# Altium PCB buoi12.PcbDoc
Units mm, origin at the board's own origin, x right, y up, seen from the top; angles counter-clockwise.
Board outline 60 x 90 mm, 2 copper layers (Top Layer, Bottom Layer); 84 components, 79 nets, 377 pads, 77 vias.
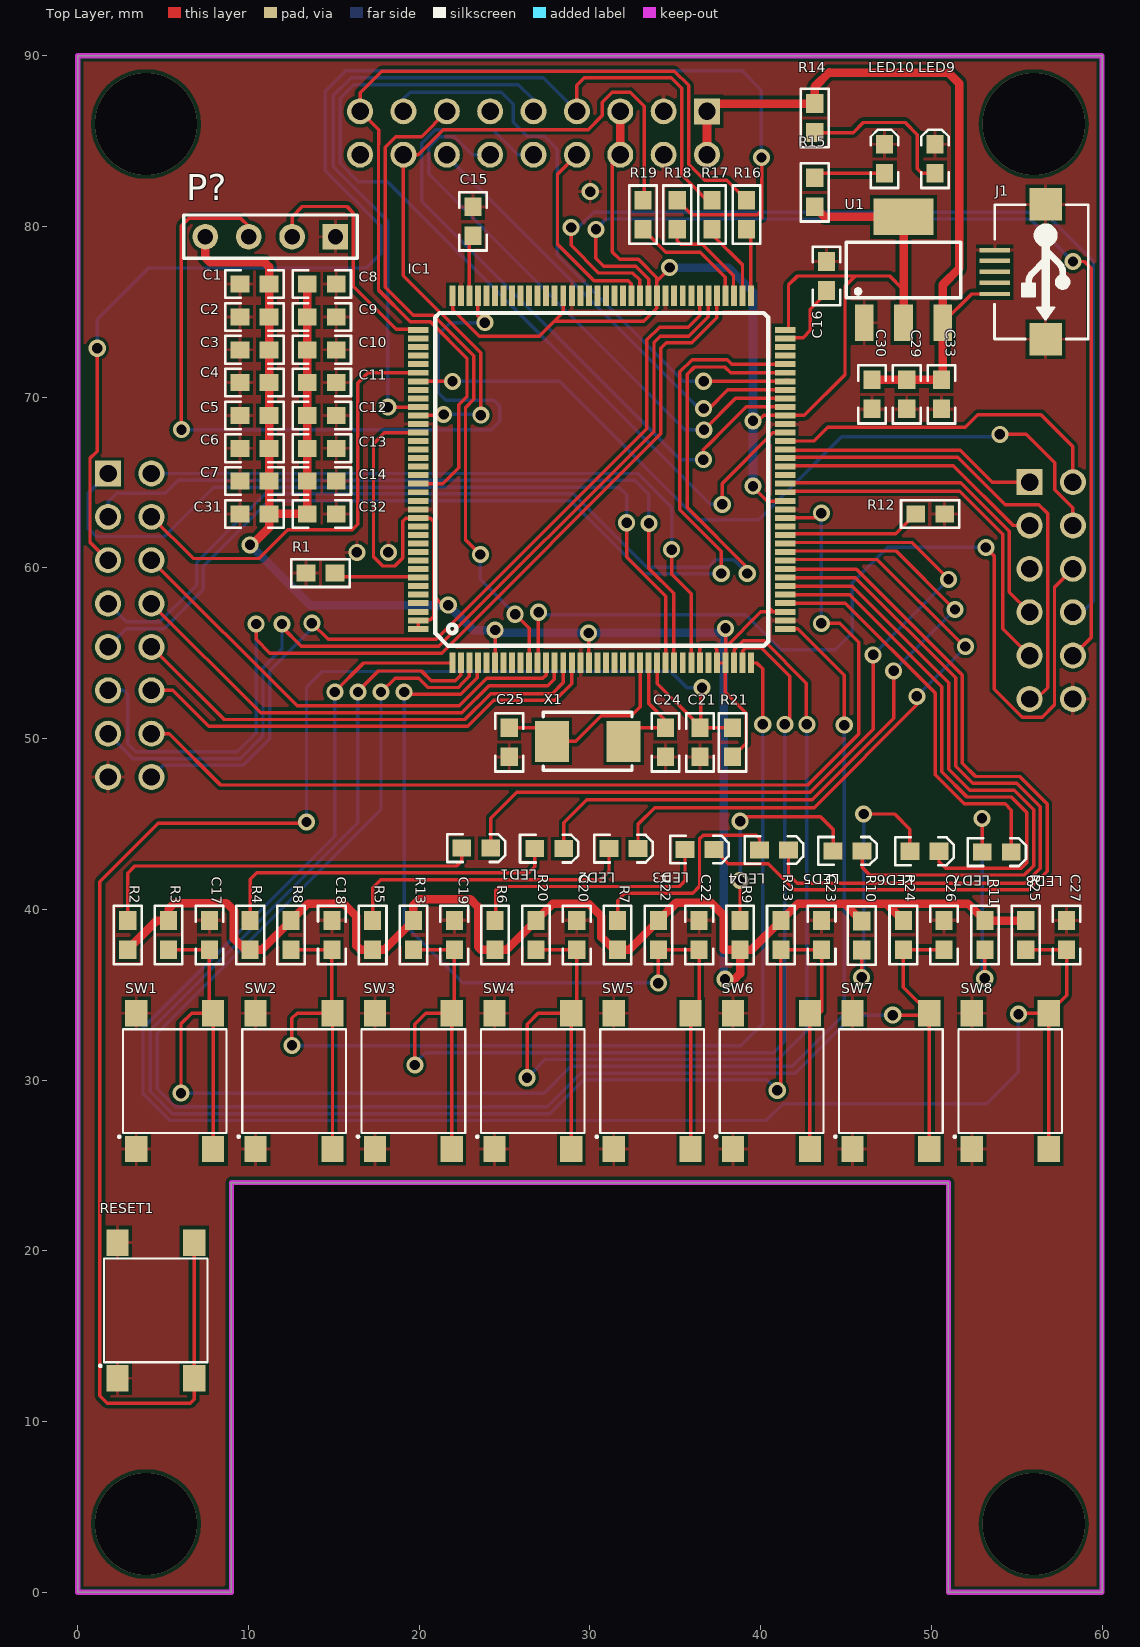
[diagram p0: Top Layer view]
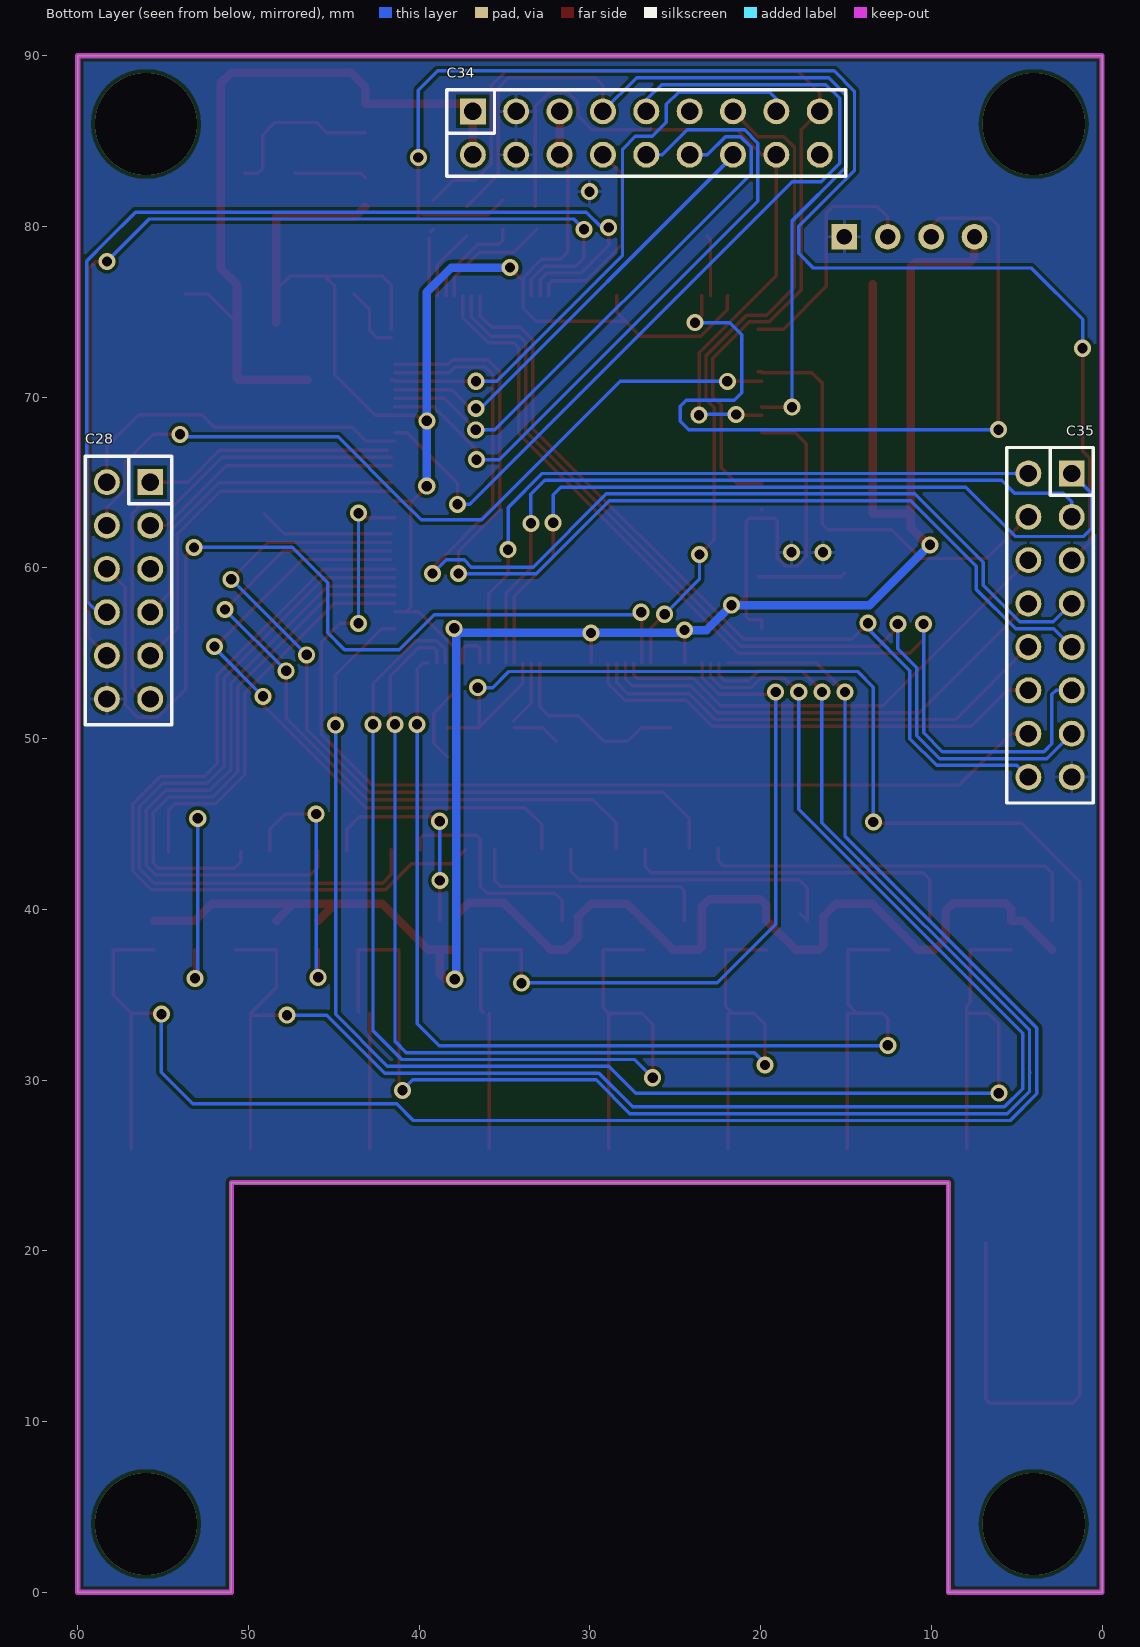
[diagram p1: Bottom Layer view, seen from below]
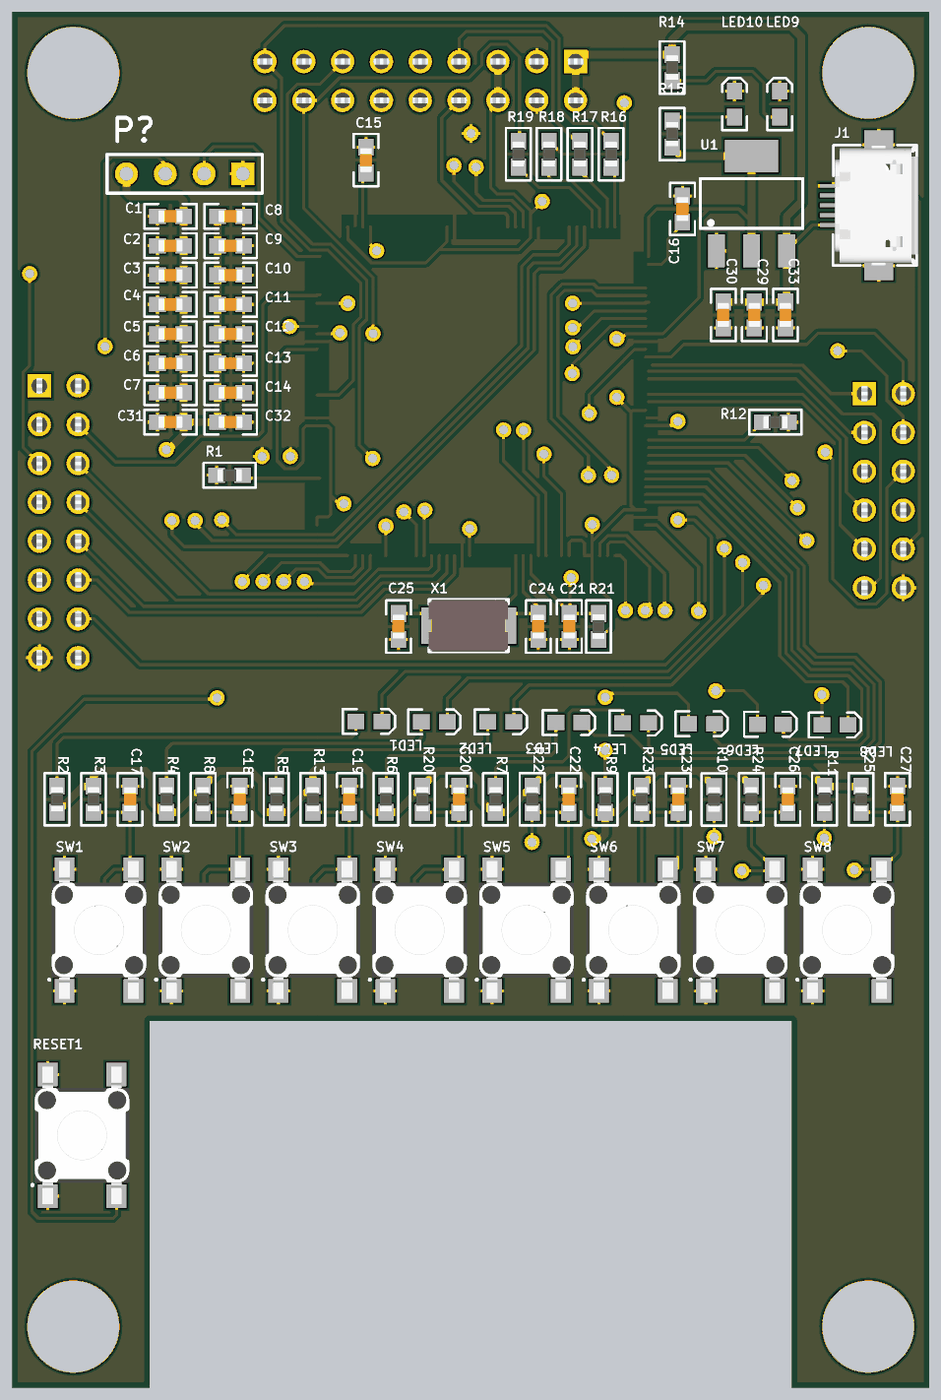
[diagram p2: 3D render of the assembled board from above, using the file's embedded part models]
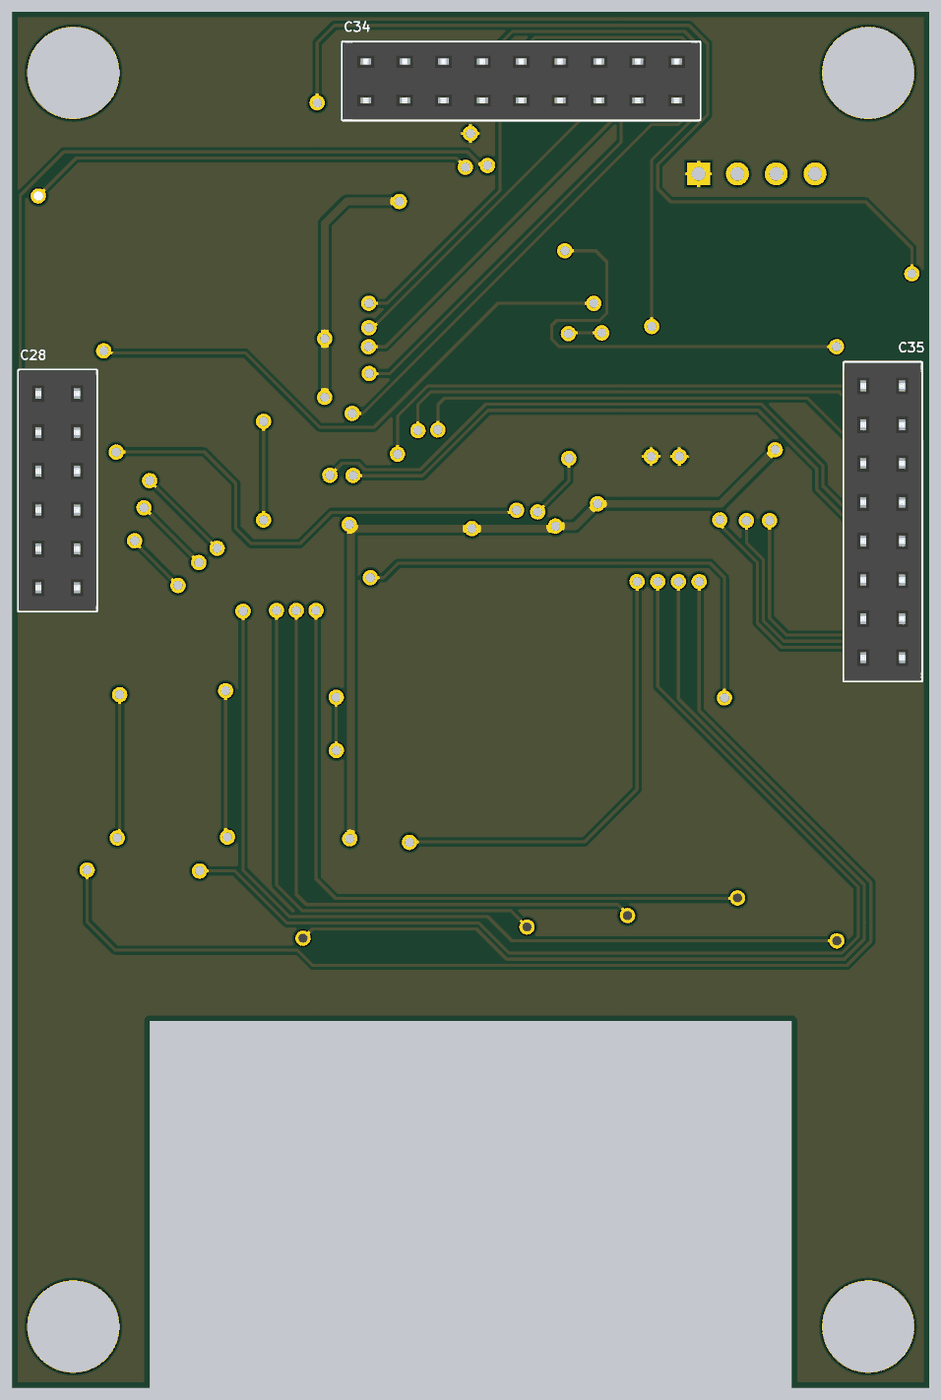
[diagram p3: 3D render of the assembled board from below, using the file's embedded part models]

## Layer stack, top to bottom
Top Solder: solder mask 0.0102, Solder Resist, Dk 3.5
Top Layer: signal copper 0.0356
Dielectric 1: dielectric 0.32, FR-4, Dk 4.8
Bottom Layer: signal copper 0.0356
Bottom Solder: solder mask 0.0102, Solder Resist, Dk 3.5

## Board outline
0,0 0,90 60,90 60,0 51,0 51,24 9,24 9,0

## Design rules (kind name [scope] priority, off if disabled: settings)
Clearance [All] p1: gap=0.2 ignorepadtopadclearanceinfootprint=FALSE
PolygonConnect [All] p1: connectstyle=Relief reliefconductorwidth=0.2 reliefentries=4 polygonreliefangle="90 Angle" airgapwidth=0.2
RoutingVias [All] p1: holewidth=0.6 width=1 viastyle="Through Hole" minholewidth=0.6 minwidth=1 maxholewidth=0.6 maxwidth=1
SolderMaskExpansion [All] p1: expansion=0.102
Width [All] p1: maxlimit=0.5 minlimit=0.2 preferedwidth=0.5
30 further rules are at their usual default settings.

## Classes and differential pairs
component class buoi122: C28 C29 C30 C31 C32 C33 C34 C35 J1 U1
component class buoi121: C1 C2 C3 C4 C5 C6 C7 C8 C9 C10 C11 C12 C13 C14 C15 C16 C17 C18 C19 C20 C21 C22 C23 C24 C25 C26 C27 IC1 LED1 LED2 LED3 LED4 LED5 LED6 LED7 LED8 LED9 LED10 P? R1 R2 R3 R4 R5 R6 R7 R8 R9 R10 R11 R12 R13 R14 R15 R16 R17 R18 R19 R20 R21 R22 R23 R24 R25 RESET1 SW1 SW2 SW3 SW4 SW5 SW6 SW7 SW8 X1

## Components (designator, comment, footprint, x,y, rotation, side; value= is the part's Value field where it differs from the comment)
C1 "0.1uF" "CAPC-0603 (1608)" 10.358,76.622 r0 top value=104/50V
C2 "0.1uF" "CAPC-0603 (1608)" 10.358,74.699 r0 top value=104/50V
C3 "0.1uF" "CAPC-0603 (1608)" 10.358,72.776 r0 top value=104/50V
C4 "0.1uF" "CAPC-0603 (1608)" 10.358,70.853 r0 top value=104/50V
C5 "0.1uF" "CAPC-0603 (1608)" 10.358,68.929 r0 top value=104/50V
C6 "0.1uF" "CAPC-0603 (1608)" 10.358,67.006 r0 top value=104/50V
C7 "0.1uF" "CAPC-0603 (1608)" 10.358,65.083 r0 top value=104/50V
C8 "0.1uF" "CAPC-0603 (1608)" 14.295,76.622 r180 top value=104/50V
C9 "0.1uF" "CAPC-0603 (1608)" 14.295,74.699 r180 top value=104/50V
C10 "0.1uF" "CAPC-0603 (1608)" 14.295,72.776 r180 top value=104/50V
C11 "0.1uF" "CAPC-0603 (1608)" 14.295,70.853 r180 top value=104/50V
C12 "0.1uF" "CAPC-0603 (1608)" 14.295,68.929 r180 top value=104/50V
C13 "0.1uF" "CAPC-0603 (1608)" 14.295,67.006 r180 top value=104/50V
C14 "0.1uF" "CAPC-0603 (1608)" 14.295,65.083 r180 top value=104/50V
C15 "2.2uF" "CAPC-0603 (1608)" 23.15,80.3 r270 top value=104/50V
C16 "2.2uF" "CAPC-0603 (1608)" 43.854,77.098 r270 top value=104/50V
C17 "1nF" "CAPC-0603 (1608)" 7.712,38.49 r270 top value=104/50V
C18 "1nF" "CAPC-0603 (1608)" 14.884,38.49 r270 top value=104/50V
C19 "1nF" "CAPC-0603 (1608)" 22.057,38.49 r270 top value=104/50V
C20 "1nF" "CAPC-0603 (1608)" 29.23,38.49 r270 top value=104/50V
C21 "0.1uF" "CAPC-0603 (1608)" 36.452,49.786 r90 top value=104/50V
C22 "1nF" "CAPC-0603 (1608)" 36.402,38.49 r270 top value=104/50V
C23 "1nF" "CAPC-0603 (1608)" 43.575,38.49 r270 top value=104/50V
C24 "22pF" "CAPC-0603 (1608)" 34.42,49.786 r90 top value=104/50V
C25 "22pF" "CAPC-0603 (1608)" 25.276,49.786 r90 top value=104/50V
C26 "1nF" "CAPC-0603 (1608)" 50.747,38.49 r270 top value=104/50V
C27 "1nF" "CAPC-0603 (1608)" 57.92,38.49 r270 top value=104/50V
C28 "JP6x2" JP6-C2T 57.023,58.674 r270 bottom
C29 "0.1uF" "CAPC-0603 (1608)" 48.558,70.168 r90 top value=104/50V
C30 "0.1uF" "CAPC-0603 (1608)" 46.526,70.168 r90 top value=104/50V
C31 "0.1uF" "CAPC-0603 (1608)" 10.358,63.16 r0 top value=104/50V
C32 "0.1uF" "CAPC-0603 (1608)" 14.295,63.16 r180 top value=104/50V
C33 "0.1uF" "CAPC-0603 (1608)" 50.59,70.168 r90 top value=104/50V
C34 "JP9x2" JP9-C2T 26.698,85.471 r180 bottom
C35 "JP8x2" JP8-C2T 3.048,56.642 r270 bottom
IC1 "STM32F407ZGT6" "PCBComponent_1 - duplicate" 35.514,-58.644 r90 top
J1 "USB-5" USB-M1 53.721,77.343 r270 top
LED1 "LED" LED_0603_BLUE 23.343,43.583 r0 top value="LED 3 - 5 ly 2 Colour"
LED2 "LED" LED_0603_BLUE 27.618,43.556 r0 top value="LED 3 - 5 ly 2 Colour"
LED3 "LED" LED_0603_BLUE 31.969,43.556 r0 top value="LED 3 - 5 ly 2 Colour"
LED4 "LED" LED_0603_BLUE 36.42,43.505 r0 top value="LED 3 - 5 ly 2 Colour"
LED5 "LED" LED_0603_BLUE 40.785,43.48 r0 top value="LED 3 - 5 ly 2 Colour"
LED6 "LED" LED_0603_BLUE 45.096,43.43 r0 top value="LED 3 - 5 ly 2 Colour"
LED7 "LED" LED_0603_BLUE 49.597,43.405 r0 top value="LED 3 - 5 ly 2 Colour"
LED8 "LED" LED_0603_BLUE 53.833,43.35 r0 top value="LED 3 - 5 ly 2 Colour"
LED9 "LED" LED_0603_BLUE 50.21,83.963 r90 top value="LED 3 - 5 ly 2 Colour"
LED10 "LED" LED_0603_BLUE 47.26,83.963 r90 top value="LED 3 - 5 ly 2 Colour"
P? "Header 4" HDR1X4 15.095,79.399 r180 top
R1 "1K" "RESC-0603 (1608)" 14.224,59.69 r0 top value=2K2
R2 "1K" "RESC-0603 (1608)" 2.93,38.49 r270 top value=2K2
R3 "1K" "RESC-0603 (1608)" 5.321,38.49 r270 top value=2K2
R4 "1K" "RESC-0603 (1608)" 10.103,38.49 r270 top value=2K2
R5 "1K" "RESC-0603 (1608)" 17.275,38.49 r270 top value=2K2
R6 "1K" "RESC-0603 (1608)" 24.448,38.49 r270 top value=2K2
R7 "1K" "RESC-0603 (1608)" 31.62,38.49 r270 top value=2K2
R8 "1K" "RESC-0603 (1608)" 12.493,38.49 r270 top value=2K2
R9 "1K" "RESC-0603 (1608)" 38.793,38.49 r270 top value=2K2
R10 "1K" "RESC-0603 (1608)" 45.921,38.476 r90 top value=2K2
R11 "1K" "RESC-0603 (1608)" 53.138,38.49 r90 top value=2K2
R12 "1K" "RESC-0603 (1608)" 49.93,63.16 r180 top value=2K2
R13 "1K" "RESC-0603 (1608)" 19.666,38.49 r270 top value=2K2
R14 "1K" "RESC-0603 (1608)" 43.17,86.35 r90 top value=2K2
R15 "1K" "RESC-0603 (1608)" 43.17,82 r270 top value=2K2
R16 "1K" "RESC-0603 (1608)" 39.178,80.687 r270 top value=2K2
R17 "1K" "RESC-0603 (1608)" 37.146,80.687 r270 top value=2K2
R18 "1K" "RESC-0603 (1608)" 35.114,80.687 r270 top value=2K2
R19 "1K" "RESC-0603 (1608)" 33.11,80.687 r270 top value=2K2
R20 "1K" "RESC-0603 (1608)" 26.839,38.49 r270 top value=2K2
R21 "1K" "RESC-0603 (1608)" 38.357,49.786 r90 top value=2K2
R22 "1K" "RESC-0603 (1608)" 34.011,38.49 r270 top value=2K2
R23 "1K" "RESC-0603 (1608)" 41.184,38.49 r270 top value=2K2
R24 "1K" "RESC-0603 (1608)" 48.356,38.49 r270 top value=2K2
R25 "1K" "RESC-0603 (1608)" 55.529,38.49 r270 top value=2K2
RESET1 "SW" SW2-SMD 4.572,16.51 r90 top value="Button chip 4 pin"
SW1 "SW" SW2-SMD 5.68,29.94 r90 top value="Button chip 4 pin"
SW2 "SW" SW2-SMD 12.671,29.94 r90 top value="Button chip 4 pin"
SW3 "SW" SW2-SMD 19.663,29.94 r90 top value="Button chip 4 pin"
SW4 "SW" SW2-SMD 26.654,29.94 r90 top value="Button chip 4 pin"
SW5 "SW" SW2-SMD 33.646,29.94 r90 top value="Button chip 4 pin"
SW6 "SW" SW2-SMD 40.637,29.94 r90 top value="Button chip 4 pin"
SW7 "SW" SW2-SMD 47.629,29.94 r90 top value="Button chip 4 pin"
SW8 "SW" SW2-SMD 54.62,29.94 r90 top value="Button chip 4 pin"
U1 "AMS117-3.3V" SOT223 48.37,77.46 r0 top
X1 "8MHZ" "CRYSTAL_ABM3 5x3.2mm" 29.876,49.843 r180 top value=12MHz

## Footprints (in the part's own frame and the unit in brackets; to place one, negate y for a bottom-side part, rotate by r counter-clockwise, add the part's x,y. Pads: shape width x height; smd on the part's side, far side on the other; paste and mask are expansions set on the pad)
"CAPC-0603 (1608)" [mm] "Resistor, Chip; 1.60 mm L X 0.80 mm W X 0.50 mm H body"
  rect 1.1x1 smd mask+0.1: 1(-0.85,0) 2(0.85,0)
  silkscreen extent -1.71,-0.81 1.71,0.81, body extent -0.8,-0.4 0.8,0.4, height 0.6
"CRYSTAL_ABM3 5x3.2mm" [mm] "Crystal 5x3.2mm"
  rect 2x2.4 smd: 1(-2.1,0) 2(2.1,0)
  silkscreen extent -2.59,-1.7 2.61,1.7, body extent -2.57,-1.7 2.63,1.7, height 1.3
HDR1X4 [mm] "Connector; Header; 4 Position"
  rect 1.5x1.5 hole 0.9: 1(0,0)
  round 1.5 hole 0.9: 2(2.54,0) 3(5.08,0) 4(7.62,0)
  silkscreen extent -1.27,-1.27 8.89,1.27, body extent -1.27,-1.27 8.89,1.27, height 7
JP6-C2T [mm] "12 pins, dual row, straight, gold plating"
  rect 1.52x1.52 hole 1.02: 1(-6.35,1.27)
  round 1.52 hole 1.02: 2(-3.81,1.27) 3(-1.27,1.27) 4(1.27,1.27) 5(3.81,1.27) 6(6.35,1.27) 7(6.35,-1.27) 8(3.81,-1.27) 9(1.27,-1.27) 10(-1.27,-1.27) 11(-3.81,-1.27) 12(-6.35,-1.27)
  silkscreen extent -7.87,-2.54 7.87,2.54, body extent -7.87,-2.54 7.87,2.54, height 8.51
JP8-C2T [mm] "16 pins, dual row, straight, gold plating"
  rect 1.52x1.52 hole 1.02: 1(-8.89,1.27)
  round 1.52 hole 1.02: 2(-6.35,1.27) 3(-3.81,1.27) 4(-1.27,1.27) 5(1.27,1.27) 6(3.81,1.27) 7(6.35,1.27) 8(8.89,1.27) 9(8.89,-1.27) 10(6.35,-1.27) 11(3.81,-1.27) 12(1.27,-1.27) 13(-1.27,-1.27) 14(-3.81,-1.27) 15(-6.35,-1.27) 16(-8.89,-1.27)
  silkscreen extent -10.41,-2.54 10.41,2.54, body extent -10.41,-2.54 10.41,2.54, height 8.51
JP9-C2T [mm] "18 pins, dual row, straight, gold plating"
  rect 1.52x1.52 hole 1.02: 1(-10.16,1.27)
  round 1.52 hole 1.02: 2(-7.62,1.27) 3(-5.08,1.27) 4(-2.54,1.27) 5(0,1.27) 6(2.54,1.27) 7(5.08,1.27) 8(7.62,1.27) 9(10.16,1.27) 10(10.16,-1.27) 11(7.62,-1.27) 12(5.08,-1.27) 13(2.54,-1.27) 14(0,-1.27) 15(-2.54,-1.27) 16(-5.08,-1.27) 17(-7.62,-1.27) 18(-10.16,-1.27)
  silkscreen extent -11.68,-2.54 11.68,2.54, body extent -11.68,-2.54 11.68,2.54, height 8.51
LED_0603_BLUE [mm] "LED SMD; Body 1.6 x 0.8 mm (LxW typ)"
  rect 1.1x1 smd mask+0.1: 1(-0.851,0) 2(0.849,0)
  silkscreen extent -1.71,-0.81 1.71,0.81, body extent -0.8,-0.4 0.8,0.4, height 0.75
"PCBComponent_1 - duplicate" [mm]
  rect 1.2x0.35 smd: 1(113.075,13.576) 2(113.075,13.076) 3(113.075,12.576) 4(113.075,12.076) 5(113.075,11.576) 6(113.075,11.076) 7(113.075,10.576) 8(113.075,10.076) 9(113.075,9.576) 10(113.075,9.076) 11(113.075,8.576) 12(113.075,8.076) 13(113.075,7.576) 14(113.075,7.076) 15(113.075,6.576) 16(113.075,6.076) 17(113.075,5.576) 18(113.075,5.076) 19(113.075,4.576) 20(113.075,4.076) 21(113.075,3.576) 22(113.075,3.076) 23(113.075,2.576) 24(113.075,2.076) 25(113.075,1.576) 26(113.075,1.076) 27(113.075,0.576) 28(113.075,0.076) 29(113.075,-0.424) 30(113.075,-0.924) 31(113.075,-1.424) 32(113.075,-1.924) 33(113.075,-2.424) 34(113.075,-2.924) 35(113.075,-3.424) 36(113.075,-3.924) 73(134.575,-3.924) 74(134.575,-3.424) 75(134.575,-2.924) 76(134.575,-2.424) 77(134.575,-1.924) 78(134.575,-1.424) 79(134.575,-0.924) 80(134.575,-0.424) 81(134.575,0.076) 82(134.575,0.576) 83(134.575,1.076) 84(134.575,1.576) 85(134.575,2.076) 86(134.575,2.576) 87(134.575,3.076) 88(134.575,3.576) 89(134.575,4.076) 90(134.575,4.576) 91(134.575,5.076) 92(134.575,5.576) 93(134.575,6.076) 94(134.575,6.576) 95(134.575,7.076) 96(134.575,7.576) 97(134.575,8.076) 98(134.575,8.576) 99(134.575,9.076) 100(134.575,9.576) 101(134.575,10.076) 102(134.575,10.576) 103(134.575,11.076) 104(134.575,11.576) 105(134.575,12.076) 106(134.575,12.576) 107(134.575,13.076) 108(134.575,13.576)
  rect 0.35x1.2 smd: 37(115.075,-5.924) 38(115.575,-5.924) 39(116.075,-5.924) 40(116.575,-5.924) 41(117.075,-5.924) 42(117.575,-5.924) 43(118.075,-5.924) 44(118.575,-5.924) 45(119.075,-5.924) 46(119.575,-5.924) 47(120.075,-5.924) 48(120.575,-5.924) 49(121.075,-5.924) 50(121.575,-5.924) 51(122.075,-5.924) 52(122.575,-5.924) 53(123.075,-5.924) 54(123.575,-5.924) 55(124.075,-5.924) 56(124.575,-5.924) 57(125.075,-5.924) 58(125.575,-5.924) 59(126.075,-5.924) 60(126.575,-5.924) 61(127.075,-5.924) 62(127.575,-5.924) 63(128.075,-5.924) 64(128.575,-5.924) 65(129.075,-5.924) 66(129.575,-5.924) 67(130.075,-5.924) 68(130.575,-5.924) 69(131.075,-5.924) 70(131.575,-5.924) 71(132.075,-5.924) 72(132.575,-5.924) 109(132.575,15.576) 110(132.075,15.576) 111(131.575,15.576) 112(131.075,15.576) 113(130.575,15.576) 114(130.075,15.576) 115(129.575,15.576) 116(129.075,15.576) 117(128.575,15.576) 118(128.075,15.576) 119(127.575,15.576) 120(127.075,15.576) 121(126.575,15.576) 122(126.075,15.576) 123(125.575,15.576) 124(125.075,15.576) 125(124.575,15.576) 126(124.075,15.576) 127(123.575,15.576) 128(123.075,15.576) 129(122.575,15.576) 130(122.075,15.576) 131(121.575,15.576) 132(121.075,15.576) 133(120.575,15.576) 134(120.075,15.576) 135(119.575,15.576) 136(119.075,15.576) 137(118.575,15.576) 138(118.075,15.576) 139(117.575,15.576) 140(117.075,15.576) 141(116.575,15.576) 142(116.075,15.576) 143(115.575,15.576) 144(115.075,15.576)
  silkscreen extent 114.07,-4.92 133.58,14.58, body extent 112.82,-6.17 134.83,15.83, height 0.72
"RESC-0603 (1608)" [mm] "Resistor, Chip; 1.60 mm L X 0.80 mm W X 0.50 mm H body"
  rect 1.1x1 smd mask+0.1: 1(-0.85,0) 2(0.85,0)
  silkscreen extent -1.71,-0.81 1.71,0.81, body extent -0.8,-0.4 0.8,0.4, height 0.5
SOT223 [mm] "SOT-223/SC-73; 4 Leads; Body 6.7 x 7.3 mm, inc. leads (LxW max)"
  rect 1.1x2.15 smd: 1(-2.3,-3.1) 2(0,-3.1) 3(2.3,-3.1)
  rect 3.5x2.15 smd: 4(0,3.1)
  silkscreen extent -3.35,-1.63 3.35,1.63, body extent -3.43,-1.65 3.43,1.65, height 2.54
SW2-SMD [mm] "6*6mm vertical type, SMD, height 5.0mm, black actuator, 160gf, T&R"
  rect 1.55x1.3 smd: 1(-3.975,2.25) 2(-3.975,-2.25) 3(3.975,-2.25) 4(3.975,2.25)
  silkscreen extent -3.29,-3.04 3.04,3.29, body extent -4.5,-3.1 4.5,3.1, height 4.99
USB-M1 [mil]
  rect 10x70 smd: 1(51.18,0) 2(25.59,0) 3(0,0) 4(-25.59,0) 5(-50,0)
  rect 74.8x74.8 smd: 5(-155.51,116.84) 5(155.51,116.84)
  silkscreen extent -155,-1 155,215, body extent -157,5 158,218, height 107

## Part data
C1 C2 C3 C4 C5 C6 C7 C8 C9 C10 C11 C12 C13 C14 C15 C16 C17 C18 C19 C20 C21 C22 C23 C24 C25 C26 C27 C29 C30 C31 C32 C33: library part C0603C104K5RACTU, "CAP CER 0.1uF 50V 10% X7R 0603", Category=CAPACITOR, CompanyID=VT-00982, MPN=C0603C104K5RACTU, PinCount=2, Solder=SMT
C28: "WR-PHD 2.54 mm Dual Socket Header", Manufacturer="Würth Elektronik eiSos GmbH", partNo=61301221821, ComponentLink1 Description=Manufacturer, ComponentLink1URL=http://www.we-online.com, ComponentLink2 Description=Datasheet, ComponentLink2URL=http://katalog.we-online.de/em/datasheet/6130xx21821.pdf, Created by="Karrer Zheng", Created Date="29 March 2013", NoPins=12
C34: "WR-PHD 2.54 mm Dual Socket Header", Manufacturer="Würth Elektronik eiSos GmbH", partNo=61301821821, ComponentLink1 Description=Manufacturer, ComponentLink1URL=http://www.we-online.com, ComponentLink2 Description=Datasheet, ComponentLink2URL=http://katalog.we-online.de/em/datasheet/6130xx21821.pdf, Created by="Karrer Zheng", Created Date="29 March 2013", NoPins=18
C35: "WR-PHD 2.54 mm Dual Socket Header", Manufacturer="Würth Elektronik eiSos GmbH", partNo=61301621821, ComponentLink1 Description=Manufacturer, ComponentLink1URL=http://www.we-online.com, ComponentLink2 Description=Datasheet, ComponentLink2URL=http://katalog.we-online.de/em/datasheet/6130xx21821.pdf, Created by="Karrer Zheng", Created Date="29 March 2013", NoPins=16
IC1: library part STM32
J1: Manufacturer=FCI, Manufacturer Part Number=10118193-0001LF, Supplier Part Number 1=609-4616-1-ND, .Checked PCB=RF, .Checked SCH=MM, .Creator=MM, Category="Connectors, Interconnects", ComponentLink1Description=http://portal.fciconnect.com/Comergent//fci/drawing/10118193.pdf, ComponentLink1URL=http://portal.fciconnect.com/Comergent//fci/drawing/10118193.pdf, Connector Type="USB - micro B", Features="Shielded, Solder Retention", Gender=Receptacle, Ingress Protection=-, Mounting Type="Surface Mount, Right Angle, Horizontal", Number of Contacts=5, Packaging="Cut Tape (CT)", Pricing 1="1=0.46, 10=0.433, 25=0.3712, 50=0.3156, 100=0.3032, 250=0.27224, 500=0.25988 (USD)", RoHS="RoHS Compliant", Specifications="USB 2.0", Stock 1=28642, Supplier 1=Digi-Key
LED1 LED2 LED3 LED4 LED5 LED6 LED7 LED8 LED9 LED10: library part "LED SMD"
P?: "Header, 4-Pin", LatestRevisionDate=17-Jul-2002, LatestRevisionNote="Re-released for DXP Platform.", Publisher="Altium Limited"
R1 R2 R3 R4 R5 R6 R7 R8 R9 R10 R11 R12 R13 R14 R15 R16 R17 R18 R19 R20 R21 R22 R23 R24 R25: library part CRCW06032K20FKEA, "RES SMD 2.2K OHM 1% 1/10W 0603", Category=RESISTOR, CompanyID=VT-00776, MPN=CRCW06032K20FKEA, Solder=SMT
RESET1 SW1 SW2 SW3 SW4 SW5 SW6 SW7 SW8: library part SW4, "Switch button 4 pin"
U1: library part AMS117-1.2V
X1: library part ABM3-12.000MHZ-D2Y-T, "CRYSTAL 25.0000MHZ 18pF SMD", Category=CRYSTAL, CompanyID=VT-01247, MPN=ABM3-12.000MHZ-D2Y-T, Solder=SMT

## Via types
v1: diameter 1, hole 0.6, Top Layer to Bottom Layer, 73 vias
v2: diameter 6, hole 6, Top Layer to Bottom Layer, 4 vias

## Nets (pads, with @x,y where several pads share a name; then routed paths per layer and width w, separated by ;. In a path a pad name is that pad's centre, name@x,y a point inside that pad or via, vN(x,y) a via of type N, cw(c..) or ccw(c..) an arc to the next point about the centre after c; other vN are vias at no path point)
+3.3V: C1.2 C2.2 C3.2 C4.2 C5.2 C6.2 C7.2 C8.2 C9.2 C10.2 C11.2 C12.2 C13.2 C14.2 C31.2 C32.2 C34.3 C34.16 IC1.6 IC1.17 IC1.30 IC1.32 IC1.33 IC1.39 IC1.52 IC1.62 IC1.72 IC1.84 IC1.95 IC1.108 IC1.121 IC1.131 IC1.143 IC1.144 P?.4 R2.2 R3.1 R4.2 R5.2 R6.2 R7.2 R8.1 R9.2 R10.2 R11.2 R13.1 R15.2 R20.1 R21.1 R22.1 R23.1 R24.1 R25.1 U1.2 U1.4 | length 299.1
  Top Layer w0.2: IC1.144 IC1.143 19.963,56.956 20.662,56.956 20.838,57.132 20.838,58.356 ; IC1.121 19.913,67.906 17.96,67.906 17.325,67.271 17.325,60.642 17.857,60.11 18.567,60.11 19.038,60.581 19.038,62.73 19.214,62.906 19.913,62.906 IC1.131 19.963,62.906 20.662,62.906 20.838,62.73 20.838,58.356 ; v1(21.703,57.817) 21.377,57.817 20.838,58.356 ; IC1.108 21.963,75.906 21.963,75.117 23.515,73.565 27.041,73.565 27.912,74.436 ; IC1.6 24.452,54.445 v1(24.452,56.356) ; IC1.95 28.438,74.962 27.912,74.436 ; v1(29.929,56.194) 29.929,54.44 IC1.17 ; C34.16 31.306,83.729 31.306,78.505 31.74,78.071 32.846,78.071 33.913,77.004 33.913,76.856 ; v1(34.674,77.594) 34.674,77.567 33.938,76.831 33.913,76.856 ; IC1.30 36.438,55.277 36.592,55.431 37.257,55.431 37.438,55.25 IC1.32 IC1.33 ; v1(37.949,56.462) 37.949,55.365 ; R21.1 39.157,49.736 39.157,51.491 37.938,52.71 IC1.33 ; v1(39.553,68.613) 39.852,68.613 40.17,68.931 IC1.62 42.565,68.931 44.94,71.306 44.94,76.493 45.545,77.098 ; v1(39.557,64.785) 39.513,64.785 40.482,63.816 ; 40.714,57.456 40.482,57.688 40.482,63.816 ; IC1.39 40.015,57.431 37.949,55.365 ; IC1.52 41.413,63.906 40.572,63.906 40.482,63.816 ; IC1.72@41.63,73.99 41.63,76.57 42.158,77.098 45.545,77.098 ; 48.37,76.324 48.336,76.324 47.562,77.098 45.545,77.098 ; 27.912,74.436 33.142,74.436 33.913,75.207 33.913,76.856 ; IC1.33 37.938,54.568 37.949,54.579 37.949,55.365
  Top Layer w0.5: R2.2 4.63,39.34 R3.1 5.321,40.021 5.67,40.37 8.71,40.37 9.153,39.927 9.153,38.277 9.79,37.64 R4.2 10.793,37.64 R8.1 13.493,40.34 15.571,40.34 16.325,39.586 16.325,37.875 16.56,37.64 R5.2 17.966,37.64 R13.1 19.666,40.252 20.017,40.603 22.992,40.603 23.451,40.144 23.451,37.799 23.61,37.64 R6.2 25.139,37.64 R20.1 27.839,40.34 29.916,40.34 30.67,39.586 30.67,38.38 31.41,37.64 R7.2 32.311,37.64 R22.1 35.061,40.39 37.09,40.39 37.84,39.64 37.84,37.64 R9.2 ; P?.4 7.475,78.181 7.75,77.906 10.931,77.906 11.208,77.629 C1.2 C2.2 C3.2 C4.2 C5.2 C6.2 C7.2 C31.2 ; v1(10.084,61.353) 10.207,61.353 11.208,62.354 C31.2 ; C8.2 C9.2 C10.2 C11.2 C12.2 C13.2 C14.2 C32.2 C31.2 ; C34.16 C34.3 ; v1(37.916,35.907) 38.463,35.907 38.793,36.237 R9.2 ; R15.2 43.76,80.56 U1.4 48.37,76.324 U1.2 ; R10.2 44.907,40.34 ; R24.1 47.356,40.34 ; R25.1 R11.2 52.138,40.34 47.356,40.34 ; R9.2 39.484,37.64 R23.1 42.184,40.34 44.907,40.34 ; 44.907,40.34 47.356,40.34
  Bottom Layer w0.5: v1(10.084,61.353) 13.62,57.817 v1(21.703,57.817) 23.164,56.356 v1(24.452,56.356) 24.614,56.194 v1(29.929,56.194) 37.681,56.194 v1@37.841,56.354 ; v1(34.674,77.594) 38.111,77.594 39.553,76.152 v1(39.553,68.613) 39.553,64.789 v1(39.557,64.785) ; v1(37.916,35.907) 37.841,35.982 v1@37.841,56.354 ; v1(37.949,56.462) v1@37.841,56.354
+5V: C29.2 C30.2 C33.2 C34.1 C34.18 J1.1 R14.2 U1.3 | length 44.7
  Top Layer w0.2: U1.3 52.353,76.043 J1.1
  Top Layer w0.5: C34.18 C34.1 37.317,87.2 R14.2 43.17,88.18 44.03,89.04 44.06,89.01 50.994,89.01 51.62,88.384 51.62,77.54 50.67,76.59 U1.3 50.67,71.098 C33.2 C29.2 C30.2
D0: C28.8 IC1.85 | length 59.8
  Top Layer w0.2: v1(30.352,79.833) 30.352,78.136 30.817,77.671 32.68,77.671 33.438,76.913 IC1.85 ; v1(58.29,77.948) 58.956,77.948 59.353,77.551 59.353,55.924 C28.8
  Bottom Layer w0.2: v1(30.352,79.833) 30.955,80.436 55.802,80.436 v1(58.29,77.948)
D1: C28.9 IC1.86 | length 60.4
  Top Layer w0.2: v1(28.903,79.943) 28.903,78.889 30.521,77.271 32.514,77.271 32.913,76.872 32.913,75.956 IC1.86
  Bottom Layer w0.2: v1(28.903,79.943) 29.321,79.943 30.214,80.836 56.617,80.836 58.29,79.163 59.476,77.977 59.476,58.05 58.83,57.404 C28.9
D2: C35.15 IC1.114 | length 26.2
  Top Layer w0.2: C35.15 6.757,60.553 10.637,60.553 12.314,62.23 16.07,62.23 16.4,62.56 16.4,70.83 17.001,71.431 IC1.114 ; IC1.114@19.938,71.49 IC1.114@20.13,71.49
D3: C28.11 IC1.115 | length 47.5
  Top Layer w0.2: IC1.115 21.949,70.931 v1(21.952,70.928) ; v1(54.009,67.823) 55.564,67.823 57.233,66.154 57.233,64.585 58.293,63.525 C28.11
  Bottom Layer w0.2: v1(21.952,70.928) 28.218,70.928 36.327,62.819 39.884,62.819 41.096,64.031 44.737,67.672 53.858,67.672 v1(54.009,67.823)
D4: C28.1 IC1.58 | length 14.9
  Top Layer w0.2: IC1.58@41.875,66.892 51.016,66.892 ; 50.771,66.89 51.702,66.89 53.568,65.024 C28.1
D5: C28.12 IC1.59 | length 20.4
  Top Layer w0.2: IC1.59 43.11,67.431 43.923,68.244 51.989,68.244 52.726,68.981 56.422,68.981 58.293,67.11 C28.12
D6: C34.5 IC1.60 | length 53.3
  Top Layer w0.2: v1(37.753,63.726) 37.753,64.945 40.714,67.906 41.413,67.906 IC1.60
  Bottom Layer w0.2: C34.5 26.698,87.413 25.801,88.31 16.18,88.31 15.376,87.506 15.376,83.693 16.44,82.629 18.146,82.629 37.049,63.726 v1(37.753,63.726)
D7: C34.14 IC1.63 | length 40
  Top Layer w0.2: v1(36.643,66.341) 36.643,66.92 37.011,67.288 37.017,67.288 37.486,67.757 37.486,67.763 39.154,69.431 IC1.63
  Bottom Layer w0.2: C34.14 25.761,84.201 24.301,85.661 20.941,85.661 20.158,84.878 20.158,81.488 35.305,66.341 v1(36.643,66.341)
D8: C34.13 IC1.64 | length 33.7
  Top Layer w0.2: v1(36.686,68.088) 38.529,69.931 IC1.64
  Bottom Layer w0.2: C34.13 23.119,84.201 22.059,85.261 21.179,85.261 20.558,84.64 20.558,83.092 35.562,68.088 v1(36.686,68.088)
D9: C34.12 IC1.65 | length 26.5
  Top Layer w0.2: v1(36.665,69.33) 36.975,69.33 38.077,70.432 IC1.65 IC1.65
  Bottom Layer w0.2: C34.12 21.618,84.126 36.414,69.33 v1(36.665,69.33) v1@36.682,69.33
D10: C34.8 IC1.66 | length 34.7
  Top Layer w0.2: v1(36.665,70.931) IC1.66 ; IC1.66@41.438,70.99 IC1.66@41.63,70.99
  Bottom Layer w0.2: C34.8 19.078,87.482 19.466,87.87 24.808,87.87 25.521,87.157 25.521,86.096 26.341,85.276 27.334,85.276 28.089,84.521 28.089,78.301 35.459,70.931 v1(36.665,70.931)
D11: C35.4 IC1.67 | length 63.2
  Top Layer w0.2: v1(39.217,59.678) 39.217,60.022 35.7,63.539 35.7,71.342 36.127,71.769 37.902,71.769 38.24,71.431 IC1.67
  Bottom Layer w0.2: C35.4 2.855,56.835 4.813,56.835 6.962,58.984 6.962,60.319 10.975,64.332 29.032,64.332 33.317,60.047 36.943,60.047 37.364,60.468 38.427,60.468 v1(39.217,59.678)
D12: C35.5 IC1.68 | length 61.4
  Top Layer w0.2: v1(37.695,59.668) 37.695,60.978 35.273,63.4 35.273,71.481 35.987,72.195 38.042,72.195 38.306,71.931 IC1.68
  Bottom Layer w0.2: C35.5 2.838,56.432 5.058,56.432 7.362,58.736 7.362,60.098 11.196,63.932 28.866,63.932 33.151,59.647 37.674,59.647 v1(37.695,59.668)
D13: C35.6 IC1.77 | length 59.3
  Top Layer w0.2: v1(10.454,56.718) 10.454,55.815 11.257,55.012 21.32,55.012 34.156,67.848 34.156,72.87 34.462,73.176 35.964,73.176 37.438,74.65 IC1.77
  Bottom Layer w0.2: C35.6 2.696,52.832 2.94,52.588 2.94,49.696 3.404,49.232 9.35,49.232 10.454,50.336 v1(10.454,56.718)
D14: C35.7 IC1.78 | length 55.1
  Top Layer w0.2: v1(11.966,56.718) 11.966,56.539 13.093,55.412 21.154,55.412 33.756,68.014 33.756,73.216 34.116,73.576 35.799,73.576 36.938,74.716 IC1.78
  Bottom Layer w0.2: C35.7 3.238,48.832 9.516,48.832 10.854,50.17 10.854,54.155 11.966,55.267 v1(11.966,56.718)
D15: C35.9 IC1.79 | length 50.8
  Top Layer w0.2: v1(13.713,56.765) 14.666,55.812 20.988,55.812 33.337,68.161 33.337,73.363 34.078,74.104 35.761,74.104 36.438,74.781 IC1.79
  Bottom Layer w0.2: C35.9 4.998,48.432 9.681,48.432 11.254,50.005 11.254,53.989 13.713,56.448 v1(13.713,56.765)
DGND: C1.1 C2.1 C3.1 C4.1 C5.1 C6.1 C7.1 C8.1 C9.1 C10.1 C11.1 C12.1 C13.1 C14.1 C15.1 C16.1 C17.1 C18.1 C19.1 C20.1 C21.1 C22.1 C23.1 C24.1 C25.1 C26.1 C27.1 C28.7 C29.1 C30.1 C31.1 C32.1 C33.1 C34.2 C34.17 C35.8 IC1.16 IC1.38 IC1.51 IC1.61 IC1.83 IC1.94 IC1.107 IC1.120 IC1.130 J1.5 LED9.2 LED10.2 P?.1 R1.1 R12.1 RESET1.1 RESET1.4 SW1.1 SW1.4 SW2.1 SW2.4 SW3.1 SW3.4 SW4.1 SW4.4 SW5.1 SW5.4 SW6.1 SW6.4 SW7.1 SW7.4 SW8.1 SW8.4 U1.1 | length 0
  Top Layer w0.2: IC1.130@19.938,63.406 IC1.130
  other v1: 16.348,60.91 18.195,60.91 30.022,82.036
FSMC_A0: C34.7 IC1.10 | length 39.3
  Top Layer w0.2: C34.7 20.138,85.261 18.639,85.261 18.018,84.64 18.018,76.442 19.654,74.806 20.828,74.806 23.199,72.435 23.199,69.869 22.714,69.384 22.714,61.654 v1(23.583,60.785) ; v1(25.623,57.285) 26.438,56.47 IC1.10
  Bottom Layer w0.2: v1(23.583,60.785) 23.583,59.325 v1(25.623,57.285)
FSMC_A1: C28.10 IC1.11 | length 55.7
  Top Layer w0.2: IC1.11 26.963,54.456 26.963,57.365 v1(26.999,57.401) ; v1(53.189,61.194) 53.684,60.699 53.684,52.894 55.319,51.259 56.498,51.259 57.213,51.974 57.213,58.864 C28.10
  Bottom Layer w0.2: v1(26.999,57.401) 27.138,57.262 39.125,57.262 41.175,55.212 44.374,55.212 45.363,56.201 45.363,59.129 47.446,61.212 v1@53.189,61.212
FSMC_A2: C35.14 IC1.12 | length 28.1
  Top Layer w0.2: C35.14 12.85,51.92 22.34,51.92 23.951,53.531 27.243,53.531 27.438,53.726 IC1.12
FSMC_A3: C35.13 IC1.13 | length 28
  Top Layer w0.2: C35.13 10.71,51.52 22.506,51.52 24.089,53.103 27.526,53.103 27.913,53.49 27.913,54.406 IC1.13
FSMC_A4: C35.12 IC1.14 | length 27.9
  Top Layer w0.2: C35.12 8.57,51.12 22.671,51.12 24.192,52.641 27.791,52.641 28.438,53.288 IC1.14
FSMC_A5: C35.11 IC1.15 | length 27.7
  Top Layer w0.2: C35.11 5.562,52.832 7.674,50.72 22.837,50.72 24.358,52.241 27.957,52.241 28.938,53.222 IC1.15
FSMC_A6: C35.10 IC1.50 | length 60.6
  Top Layer w0.2: C35.10 5.354,50.292 8.362,47.284 42.757,47.284 45.744,50.271 45.744,55.656 44.644,56.756 v1@43.58,56.756 ; IC1.50 43.278,62.931 v1(43.554,63.207)
  Bottom Layer w0.2: v1(43.554,56.756) v1(43.554,63.207)
FSMC_A7: C28.5 IC1.53 | length 21.3
  Top Layer w0.2: IC1.53@41.63,64.49 51.65,64.49 54.17,61.97 54.17,56.447 C28.5
FSMC_A8: C28.4 IC1.54 | length 19.3
  Top Layer w0.2: IC1.54@41.63,64.99 51.724,64.99 54.57,62.144 54.57,58.587 C28.4
FSMC_A9: C28.3
FSMC_A09: IC1.55
FSMC_A10: C28.2 IC1.56 | length 15.6
  Top Layer w0.2: IC1.56@41.63,65.99 51.29,65.99 54.796,62.484 C28.2
FSMC_A11: C28.6 IC1.57 | length 28.1
  Top Layer w0.2: IC1.57@41.63,66.49 51.536,66.49 54.326,63.7 56.3,63.7 56.813,63.187 56.813,52.993 56.144,52.324 C28.6
FSMC_A12: C34.15 IC1.87 | length 11.7
  Top Layer w0.2: C34.15 28.102,83.065 28.102,78.967 30.238,76.831 32.237,76.831 32.413,76.655 32.413,75.931 IC1.87
FSMC_NE4: C34.9 IC1.127 R16.1 | length 57.2
  Top Layer w0.2: IC1.127 21.377,64.931 22.314,65.868 22.314,69.55 22.799,70.035 22.799,72.269 20.662,74.406 19.488,74.406 17.618,76.276 17.618,84.806 17.624,84.812 17.624,85.655 C34.9 16.538,87.828 17.81,89.1 34.936,89.1 35.778,88.258 35.778,83.651 36.73,82.699 38.016,82.699 R16.1
FSMC_NOE: C34.4 IC1.118 R17.1 | length 52.6
  Top Layer w0.2: v1(18.164,69.417) 19.924,69.417 IC1.118 ; C34.4 29.238,88.258 29.68,88.7 34.77,88.7 35.378,88.092 35.378,83.016 R17.1@37.226,81.168
  Bottom Layer w0.2: v1(18.164,69.417) 18.164,80.318 14.976,83.506 14.976,87.672 16.014,88.71 27.269,88.71 C34.4
FSMC_NWE: C34.11 IC1.119 R19.1 | length 43.4
  Top Layer w0.2: IC1.119 21.407,68.931 21.435,68.959 v1(21.435,68.992) ; v1(23.609,68.945) 23.429,68.945 23.599,69.115 23.599,72.604 19.078,77.125 C34.11 19.933,84.201 21.408,85.676 29.897,85.676 30.718,86.497 30.718,87.268 31.31,87.86 32.36,87.86 33.19,87.03 R19.1@33.19,81.168
  Bottom Layer w0.2: v1(21.435,68.992) 23.562,68.992 v1(23.609,68.945)
IRQ: C35.1 IC1.26 | length 47.6
  Top Layer w0.2: v1(32.152,62.647) 32.152,60.616 34.438,58.33 IC1.26
  Bottom Layer w0.2: C35.1 0.603,64.357 0.603,62.323 1.084,61.842 5.087,61.842 7.977,64.732 31.699,64.732 32.152,64.279 v1(32.152,62.647)
LED1: IC1.47 LED1.2 | length 47.2
  Top Layer w0.2: LED1.2 24.192,45.347 25.703,46.858 42.897,46.858 46.59,50.551 v1(46.59,54.91) ; IC1.47@41.63,61.49 48.85,61.49 v1(51.01,59.33)
  Bottom Layer w0.2: v1(46.59,54.91) v1(51.01,59.33)
LED2: IC1.46 LED2.2 | length 42.4
  Top Layer w0.2: LED2.2 28.467,45.075 29.823,46.431 43.035,46.431 47.79,51.186 v1(47.79,53.97) ; IC1.46@41.63,60.99 47.95,60.99 v1(51.38,57.56)
  Bottom Layer w0.2: v1(47.79,53.97) v1(51.38,57.56)
LED3: IC1.45 LED3.2 | length 37.7
  Top Layer w0.2: LED3.2 32.818,44.98 33.801,45.963 43.133,45.963 49.15,51.98 v1(49.15,52.48) ; IC1.45@41.63,60.49 46.84,60.49 51.93,55.4 v1(51.99,55.4)
  Bottom Layer w0.2: v1(49.15,52.48) 51.99,55.32 v1(51.99,55.4)
LED4: IC1.44 LED4.2 | length 49
  Top Layer w0.2: LED4.2 38.109,42.665 40.449,42.665 41.973,41.141 55.697,41.141 56.787,42.231 56.787,46.172 55.178,47.781 52.586,47.781 51.82,48.547 51.82,53.726 45.615,59.931 IC1.44
LED5: IC1.43 LED5.2 | length 43.9
  Top Layer w0.2: IC1.43 45.549,59.431 51.42,53.56 51.42,48.381 52.42,47.381 55.012,47.381 56.387,46.006 56.387,42.397 55.531,41.541 42.139,41.541 41.634,42.046 LED5.2
LED6: IC1.42 LED6.2 | length 37.6
  Top Layer w0.2: IC1.42 45.365,58.931 51.02,53.276 51.02,48.215 52.254,46.981 54.847,46.981 55.987,45.841 55.987,42.562 55.438,42.013 46.384,42.013 45.945,42.452 LED6.2
LED7: IC1.41 LED7.2 | length 31.3
  Top Layer w0.2: IC1.41 45.218,58.431 50.62,53.029 50.62,48.05 52.089,46.581 54.681,46.581 55.587,45.675 55.587,42.728 55.272,42.413 50.831,42.413 50.446,42.798 LED7.2
LED8: IC1.40 LED8.2 | length 23.5
  Top Layer w0.2: IC1.40 44.96,57.931 50.22,52.671 50.22,47.884 51.923,46.181 54.319,46.181 54.682,45.818 LED8.2
LRDY: C35.3 R18.1 | length 83.1
  Top Layer w0.2: v1(1.143,72.867) 1.143,66.841 0.718,66.416 0.718,61.512 C35.3 ; R18.1 35.964,80.687 39.802,80.687 39.978,80.863 ; v1(40.048,84.042) 40.058,84.032 40.058,80.494
  Bottom Layer w0.2: v1(1.143,72.867) 1.143,74.552 4.159,77.568 16.911,77.568 17.764,78.421 17.764,80.002 14.504,83.262 14.504,87.913 15.701,89.11 38.92,89.11 40.048,87.982 v1(40.048,84.042)
NetC15_2: C15.2 IC1.106 | length 3.6
  Top Layer w0.2: IC1.106 22.938,79.238 C15.2
NetC16_2: C16.2 IC1.71 | length 4
  Top Layer w0.2: IC1.71@41.63,73.49 42.49,73.49 42.91,73.91 42.91,75.15 C16.2@43.82,76.06
NetC24_2: C24.2 IC1.24 X1.1 | length 6.6
  Top Layer w0.2: X1.1 32.769,50.636 C24.2 ; IC1.24 33.438,52.066 33.432,52.06 C24.2@34.453,51.039
NetC25_2: C25.2 IC1.23 X1.2 | length 11.4
  Top Layer w0.2: C25.2 26.983,50.636 X1.2 29.176,49.843 30.676,51.343 32.409,51.343 32.938,51.872 IC1.23
NetIC1_48: IC1.48 R12.2 | length 7.9
  Top Layer w0.2: IC1.48@41.63,61.99 47.91,61.99 R12.2
NetIC1_73: IC1.73 R16.2 | length 3.6
  Top Layer w0.2: R16.2 R16.2@39.333,79.682 ; R16.2@39.413,79.313 39.413,75.956 IC1.73
NetIC1_74: IC1.74 R17.2 | length 4.2
  Top Layer w0.2: R17.2@37.226,79.468 38.938,77.756 IC1.74
NetIC1_75: IC1.75 R18.2 | length 6
  Top Layer w0.2: R18.2 35.114,79.165 35.325,78.954 36.581,78.954 38.413,77.122 38.413,75.956 IC1.75
NetIC1_76: IC1.76 R19.2 | length 7.1
  Top Layer w0.2: R19.2 34.448,78.499 36.47,78.499 37.938,77.031 IC1.76
NetIC1_138: IC1.138 R1.2 | length 5.1
  Top Layer w0.2: R1.2 15.274,59.49 IC1.138@20.13,59.49
NetLED1_1: LED1.1 R2.1 | length 23.4
  Top Layer w0.2: R2.1 2.93,42.12 3.35,42.54 22.187,42.54 22.492,42.845 LED1.1
NetLED2_1: LED2.1 R4.1 | length 20.5
  Top Layer w0.2: R4.1 10.103,41.769 10.474,42.14 26.413,42.14 26.767,42.494 LED2.1
NetLED3_1: LED3.1 R5.1 | length 18.1
  Top Layer w0.2: R5.1@17.669,39.734 R5.1 17.275,41.275 17.74,41.74 30.628,41.74 31.118,42.23 LED3.1
NetLED4_1: LED4.1 R6.1 | length 14.9
  Top Layer w0.2: R6.1 24.474,39.366 24.474,41.111 24.703,41.34 35.231,41.34 35.569,41.678 LED4.1
NetLED5_1: LED5.1 R7.1 | length 13.5
  Top Layer w0.2: R7.1 31.62,40.51 32.05,40.94 36.017,40.94 36.419,41.342 36.419,44.129 36.63,44.34 39.75,44.34 39.934,44.156 LED5.1
NetLED6_1: LED6.1 R9.1 | length 12.9
  Top Layer w0.2: v1(38.791,41.687) 38.791,39.342 R9.1 ; v1(38.802,45.163) 39.057,45.418 43.506,45.418 44.245,44.679 LED6.1
  Bottom Layer w0.2: v1(38.791,41.687) 38.802,41.698 v1(38.802,45.163)
NetLED7_1: LED7.1 R10.1 | length 15.6
  Top Layer w0.2: v1(45.918,36.02) 45.921,36.023 R10.1 ; v1(46.035,45.587) 47.843,45.587 48.746,44.684 LED7.1
  Bottom Layer w0.2: v1(45.918,36.02) 46.035,36.137 v1(46.035,45.587)
NetLED8_1: LED8.1 R11.1 | length 13.1
  Top Layer w0.2: v1(52.971,45.332) 52.982,45.321 LED8.1 ; v1(53.126,35.961) 53.138,35.973 R11.1
  Bottom Layer w0.2: v1(52.971,45.332) 52.971,36.116 v1(53.126,35.961)
NetLED9_1: LED9.1 R14.1 | length 9.7
  Top Layer w0.2: R14.1 45.417,85.5 46.005,86.088 48.461,86.088 49.169,85.38 49.169,83.389 49.446,83.112 LED9.1
NetLED10_1: LED10.1 R15.1 | length 4.2
  Top Layer w0.2: R15.1 43.432,83.112 LED10.1
NRST: C21.2 IC1.25 R21.2 RESET1.2 RESET1.3 | length 99.6
  Top Layer w0.2: RESET1.3 RESET1.2 6.822,11.31 6.595,11.083 1.723,11.083 1.3,11.506 1.3,41.623 4.709,45.032 13.312,45.032 v1(13.401,45.121) ; IC1.25 33.938,53.226 36.452,50.712 C21.2 C21.2@36.485,50.636 ; v1(36.568,52.986) 36.485,52.903 C21.2@36.485,50.636 ; R21.2 C21.2@36.485,50.636
  Bottom Layer w0.2: v1(13.401,45.121) 13.401,53.009 14.324,53.932 34.741,53.932 35.687,52.986 v1(36.568,52.986)
SWCLK: IC1.109 P?.2 | length 14.5
  Top Layer w0.2: P?.2 12.555,80.562 13.16,81.167 15.771,81.167 16.15,80.788 16.15,76.493 18.653,73.99 IC1.109@20.13,73.99
SWDIO: IC1.105 P?.3 | length 48.7
  Top Layer w0.2: v1(6.075,68.095) 6.075,80.048 6.517,80.49 9.536,80.49 10.015,80.011 P?.3 ; IC1.105 23.438,74.773 v1(23.846,74.365)
  Bottom Layer w0.2: v1(6.075,68.095) 24.213,68.095 24.71,68.592 24.71,69.47 24.365,69.815 21.557,69.815 21.11,70.262 21.11,73.659 21.816,74.365 v1(23.846,74.365)
SWITCH1: C17.2 IC1.37 R3.2 SW1.2 SW1.3 | length 85.5
  Top Layer w0.2: R3.2 C17.2 7.712,34.547 7.92,34.338 7.92,33.915 6.674,33.915 6.048,33.289 v1(6.048,29.233) ; SW1.2 SW1.3 ; IC1.37 42.182,56.431 44.906,53.707 v1@44.906,50.838
  Bottom Layer w0.2: v1(6.048,29.233) 27.312,29.233 28.887,30.808 41.861,30.808 44.898,33.845 v1(44.898,50.789)
SWITCH2: C18.2 IC1.36 R8.2 SW2.2 SW2.3 | length 67.7
  Top Layer w0.2: R8.2 C18.2 14.884,34.442 SW2.3@14.417,33.975 ; v1(12.548,32.037) 12.548,33.611 12.852,33.915 SW2.3 SW2.2 ; IC1.36 39.779,54.431 40.124,54.086 v1@40.124,51.106
  Bottom Layer w0.2: v1(12.548,32.037) 12.577,32.008 38.834,32.008 40.124,33.298 v1(40.124,50.838)
SWITCH3: C19.2 IC1.35 R13.2 SW3.2 SW3.3 | length 66.9
  Top Layer w0.2: R13.2 C19.2 22.057,34.338 SW3.3@21.694,33.975 ; v1(19.745,30.883) 19.745,33.267 20.393,33.915 SW3.3 SW3.2 ; IC1.35 38.963,54.431 38.963,55.155 39.139,55.331 40.041,55.331 41.706,53.666 41.706,51.202 v1@41.483,50.979
  Bottom Layer w0.2: v1(19.745,30.883) 19.745,30.993 20.36,31.608 40.758,31.608 41.415,32.265 v1(41.415,50.838)
SWITCH4: C20.2 IC1.34 R20.2 SW4.2 SW4.3 | length 64.3
  Top Layer w0.2: v1(26.322,30.137) 26.322,33.276 26.961,33.915 SW4.3 SW4.2 ; R20.2 C20.2 29.23,34.233 SW4.3@28.971,33.975 ; IC1.34 38.463,54.431 38.463,55.221 38.973,55.731 40.207,55.731 42.683,53.254 v1@42.683,50.854
  Bottom Layer w0.2: v1(26.322,30.137) 27.393,31.208 41.034,31.208 42.705,32.879 v1(42.705,50.838)
SWITCH5: C22.2 IC1.4 R22.2 SW5.2 SW5.3 | length 51.7
  Top Layer w0.2: v1(19.119,52.731) 19.121,52.733 19.121,52.593 22.447,52.593 23.413,53.559 23.413,54.406 IC1.4 ; v1(34.008,35.676) 34.011,35.679 R22.2 C22.2 36.402,34.129 SW5.3@36.249,33.975 ; SW5.2 SW5.3
  Bottom Layer w0.2: v1(19.119,52.731) 19.119,39.138 22.552,35.705 33.979,35.705 v1(34.008,35.676)
SWITCH6: C26.2 IC1.3 R24.2 SW7.2 SW7.3 | length 98.1
  Top Layer w0.2: v1@17.707,52.747 17.788,52.747 18.586,53.545 19.988,53.545 20.54,52.993 22.282,52.993 22.564,53.275 22.938,53.649 IC1.3 ; v1(47.739,33.804) 49.768,33.804 SW7.3 ; SW7.2 SW7.3 ; C26.2 R24.2 48.356,35.437 SW7.3
  Bottom Layer w0.2: v1(17.766,52.731) 17.766,45.863 4.65,32.747 4.65,29.5 5.717,28.433 27.493,28.433 29.468,30.408 42.027,30.408 45.423,33.804 v1(47.739,33.804)
SWITCH7: C23.2 IC1.2 R23.2 SW6.2 SW6.3 | length 96.8
  Top Layer w0.2: v1@16.398,52.761 17.6,53.963 20.135,53.963 20.705,53.393 22.116,53.393 22.438,53.715 IC1.2 ; v1(40.973,29.402) 41.184,29.613 R23.2 C23.2 43.575,34.024 SW6.3@43.526,33.975 ; SW6.2 SW6.3
  Bottom Layer w0.2: v1(16.412,52.731) 16.412,45.075 4.25,32.913 4.25,30.469 4.222,30.441 4.25,30.413 4.25,29.334 5.551,28.033 27.659,28.033 29.634,30.008 40.367,30.008 v1(40.973,29.402)
SWITCH8: C27.2 IC1.1 R25.2 SW8.2 SW8.3 | length 108.6
  Top Layer w0.2: v1@15.059,52.751 16.739,54.431 IC1.1 ; v1(55.097,33.863) 55.149,33.915 SW8.3 ; R25.2 C27.2 57.92,34.965 SW8.3 ; SW8.2 SW8.3
  Bottom Layer w0.2: v1(15.059,52.731) 15.059,44.287 3.822,33.05 3.822,29.196 5.385,27.633 40.335,27.633 41.322,28.62 53.254,28.62 55.097,30.463 v1(55.097,33.863)
SYNC0: C35.16 IC1.29 | length 40.9
  Top Layer w0.2: v1(34.791,61.067) 34.791,59.635 35.936,58.49 35.936,54.433 IC1.29
  Bottom Layer w0.2: C35.16 32.798,65.532 34.791,63.539 v1(34.791,61.067)
SYNC1: C35.2 IC1.27 | length 43.9
  Top Layer w0.2: v1(33.456,62.611) 33.456,59.966 34.913,58.509 34.913,54.456 IC1.27
  Bottom Layer w0.2: C35.2 1.778,63.88 2.278,64.38 5.131,64.38 5.883,65.132 32.632,65.132 33.456,64.308 v1(33.456,62.611)
pads on no net: C34.6 C34.10 IC1.5 IC1.7 IC1.8 IC1.9 IC1.18 IC1.19 IC1.20 IC1.21 IC1.22 IC1.28 IC1.31 IC1.49 IC1.69 IC1.70 IC1.80 IC1.81 IC1.82 IC1.88 IC1.89 IC1.90 IC1.91 IC1.92 IC1.93 IC1.96 IC1.97 IC1.98 IC1.99 IC1.100 IC1.101 IC1.102 IC1.103 IC1.104 IC1.110 IC1.111 IC1.112 IC1.113 IC1.116 IC1.117 IC1.122 IC1.123 IC1.124 IC1.125 IC1.126 IC1.128 IC1.129 IC1.132 IC1.133 IC1.134 IC1.135 IC1.136 IC1.137 IC1.139 IC1.140 IC1.141 IC1.142 J1.2 J1.3 J1.4
copper on no net:
  other v2: 4,4 56,4 4,86 56,86

## Polygon pours and split planes (outlines as drawn)
DGND on Top Layer "DGND_L01_P066" (solid, remove dead copper, pour order 66): -3.219,100.399 -3.219,-6.718 1.495,-11.432 72.407,-11.432 72.407,102.434 69.943,104.898
DGND on Top Layer "DGND_L01_P020" (solid, remove dead copper, pour order 20): 60,82.822
DGND on Top Layer "DGND_L01_P018" (solid, remove dead copper, pour order 18): 60,82.822
no net on Top Layer "NONET_L01_P008" (solid, remove dead copper, pour order 8): 0,90
DGND on Bottom Layer "DGND_L02_P064" (solid, remove dead copper, pour order 64): -4.718,94.508 -3.433,93.223 -3.433,-5.755 69.194,-5.755 66.729,-3.29 66.729,99.328
DGND on Bottom Layer "DGND_L02_P038" (solid, remove dead copper, pour order 38): 60,0.2
no net on Bottom Layer "NONET_L02_P028" (solid, remove dead copper, pour order 28): 60.003,71.651

## Keep-outs
Keep-Out Layer:
  the board outline again, w0.3

## Other copper
Bottom Layer:
  region net D3: 41.096,64.031